# Altium PCB board.PcbDoc
Units mm, origin at the board's own origin, x right, y up, seen from the top; angles counter-clockwise.
Board outline 30.1 x 16.2 mm, 2 copper layers (Top Layer, Bottom Layer); 31 components, 29 nets, 112 pads, 16 vias.
Unrouted connection lines stored in the file: 1.
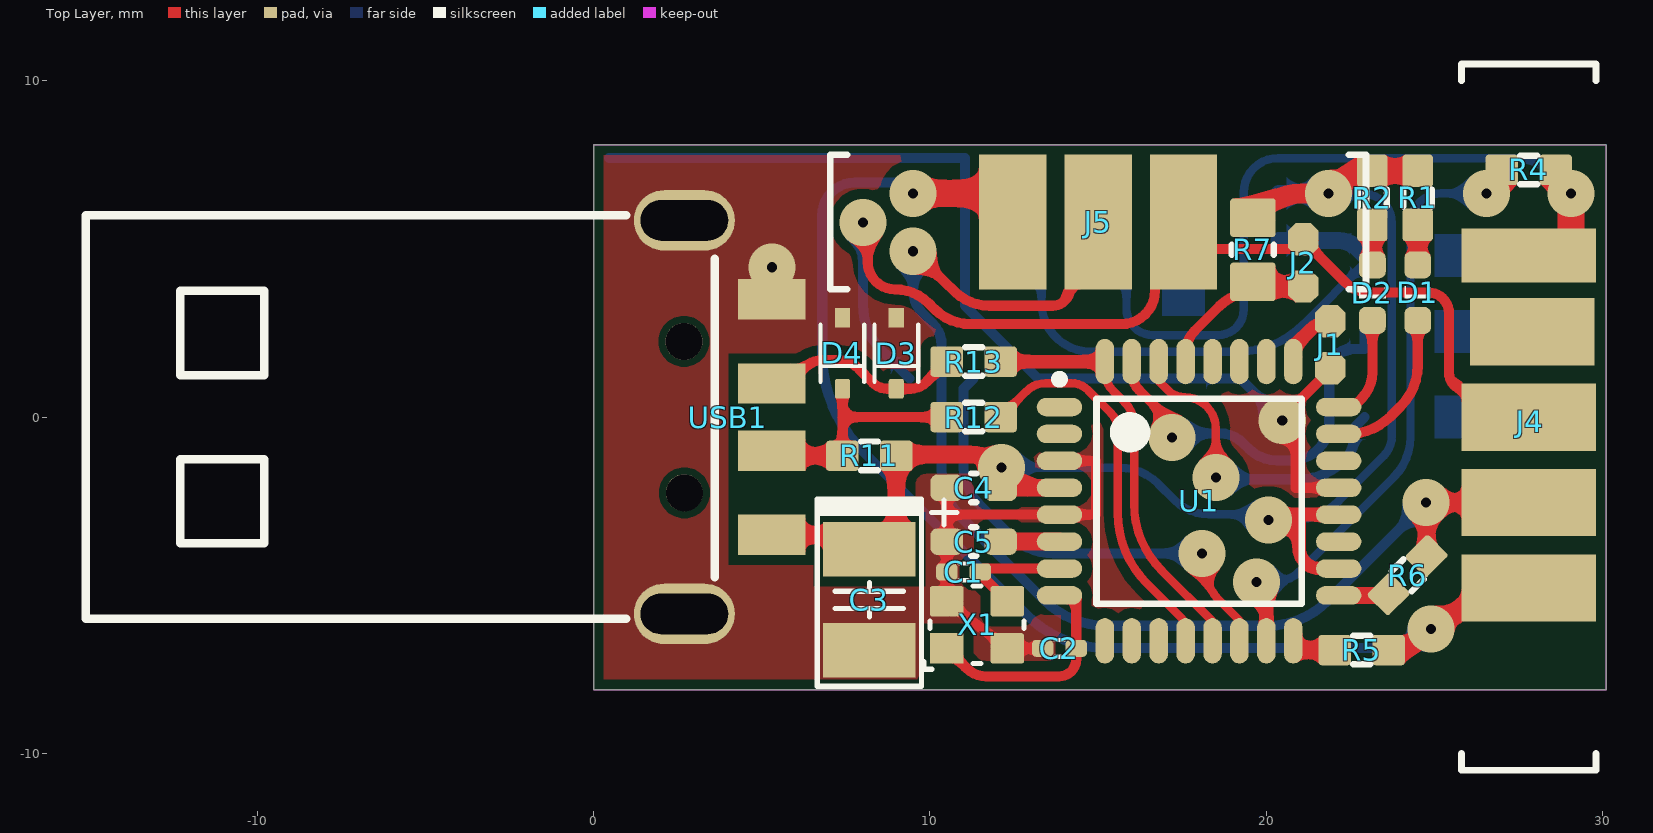
[diagram p0: Top Layer view]
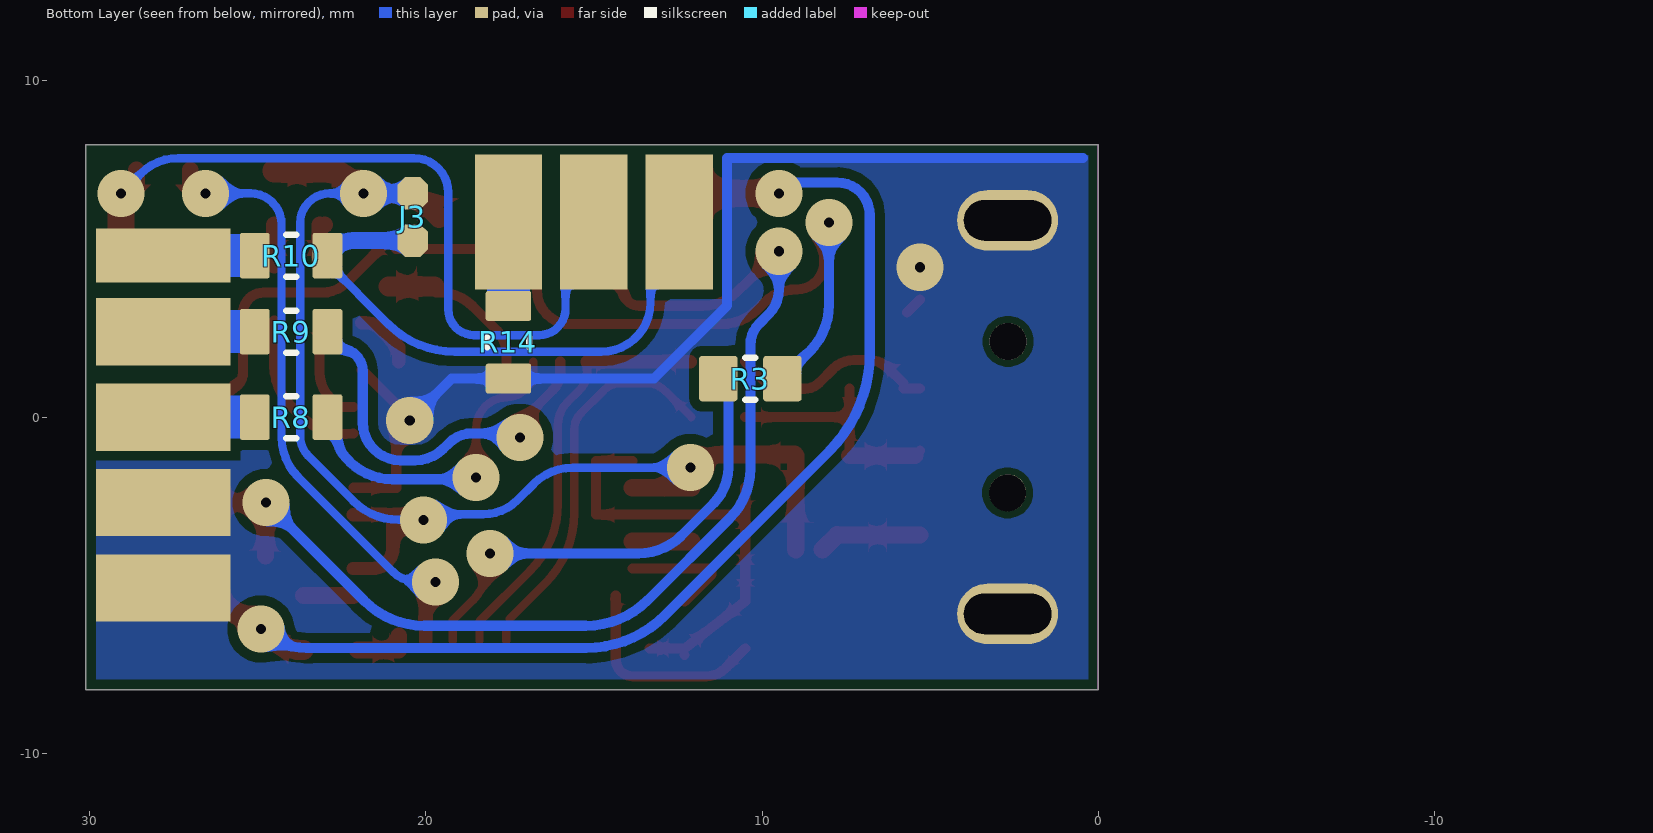
[diagram p1: Bottom Layer view, seen from below]
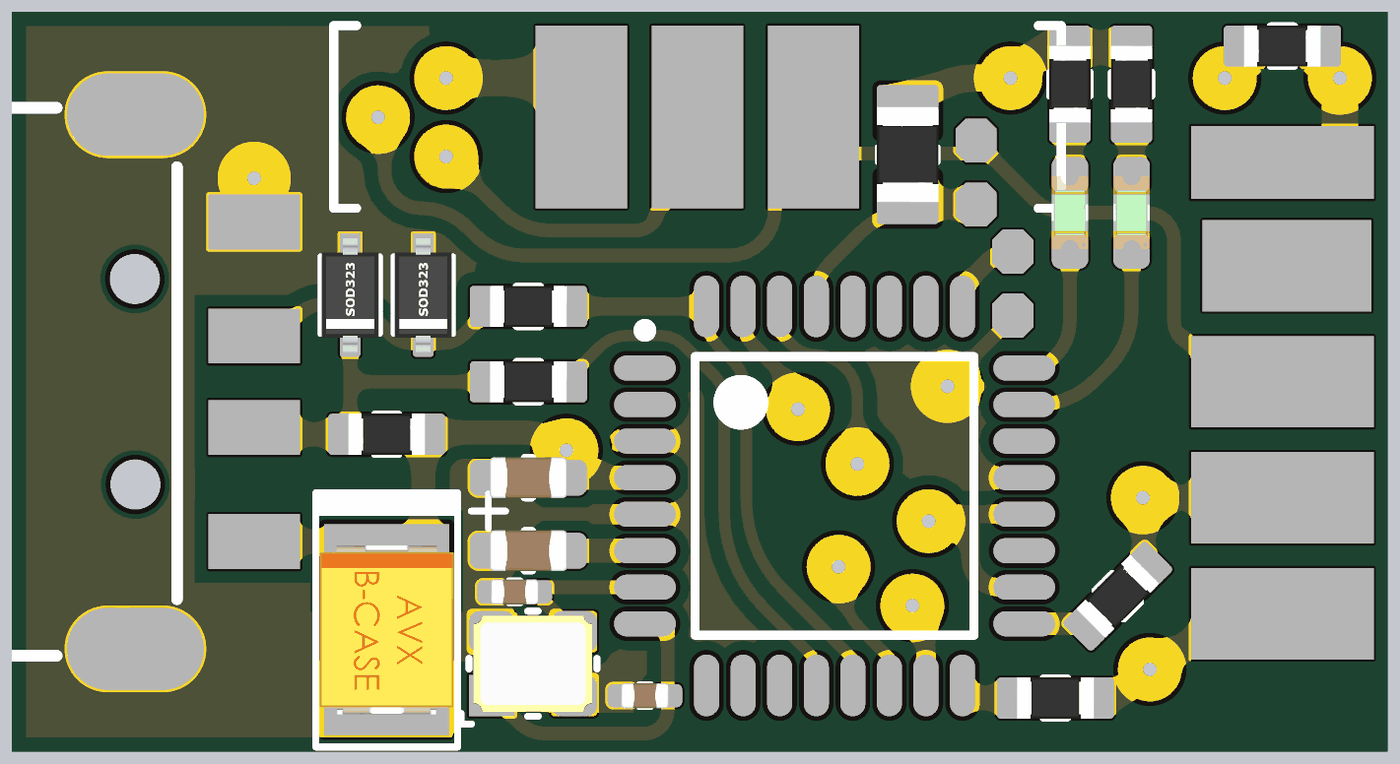
[diagram p2: 3D render of the assembled board from above, using the file's embedded part models]
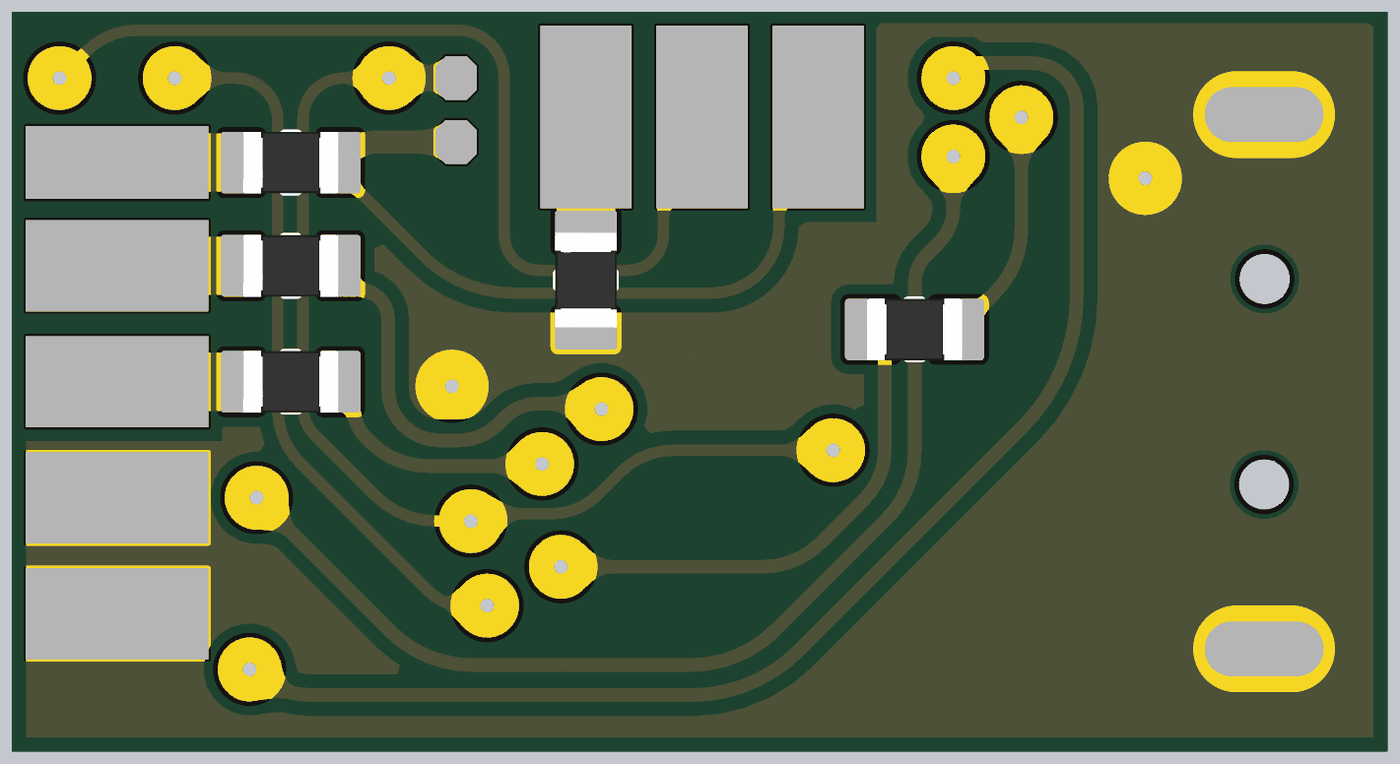
[diagram p3: 3D render of the assembled board from below, using the file's embedded part models]

## Layer stack, top to bottom
Top Solder: solder mask 0.0102, Solder Resist, Dk 3.5
Top Layer: signal copper 0.0356
Dielectric 1: dielectric 0.32, FR-4, Dk 4.8
Bottom Layer: signal copper 0.0356
Bottom Solder: solder mask 0.0102, Solder Resist, Dk 3.5

## Board outline
0,-8.1 0,8.1 30.1,8.1 30.1,-8.1

## Design rules (kind name [scope] priority, off if disabled: settings)
Clearance [All] p1: gap=0.2 ignorepadtopadclearanceinfootprint=FALSE except(0.3: Arc-Fill Arc-Poly Arc-Region Track-Fill Track-Poly Track-Region SMDPad-Fill SMDPad-Poly SMDPad-Region THPad-Fill THPad-Poly THPad-Region Via-Fill Via-Poly Via-Region Fill-Fill Fill-Poly Fill-Region Poly-Poly Poly-Region Region-Region)
ComponentClearance [All] p1: gap=0.01 collisioncheckmode=3 verticalgap=0.01 showdistances=FALSE donotcheckwithout3dbody=TRUE
HoleSize [All] p1: absolutevalues=TRUE maxlimit=3 minlimit=0.025 maxpercent=80.000 minpercent=20.000
MinimumSolderMaskSliver [All] p1 off: minsoldermaskwidth=0.254
PolygonConnect [All] p1: connectstyle=Direct reliefconductorwidth=0.254 reliefentries=4 polygonreliefangle="90 Angle" airgapwidth=0.254
RoutingVias [All] p1 off: holewidth=0.711 width=1.27 viastyle="Through Hole" minholewidth=0.711 minwidth=1.27 maxholewidth=0.711 maxwidth=1.27
SilkToSilkClearance [All] p1 off: silktosilkclearance=0.254
SilkToSolderMaskClearance [IsPad] p1 off: minsilkscreentomaskgap=0.254 clearancetoexposedcopper=TRUE
SolderMaskExpansion [All] p1: expansion=0.102 istentingtop=FALSE
SupplyNets "Schematic Supply Nets_1" [InNet('5V')] p1: voltage=0.000
SupplyNets "Schematic Supply Nets_3" [InNet('GND')] p2: voltage=0.000
Width [All] p1: maxlimit=12.7 minlimit=0.051 preferedwidth=0.254
25 further rules are at their usual default settings.

## Components (designator, comment, footprint, x,y, rotation, side; value= is the part's Value field where it differs from the comment)
C1 "18pF" C0402 11,-4.6 r0 top
C2 "18pF" C0402 13.85,-6.873 r0 top
C3 "100uF 16V" C3528 8.2,-5.432 r270 top
C4 "100n" C0603 11.3,-2.1 r0 top
C5 "100n" C0603 11.3,-3.7 r0 top
D1 "GRN" LED-0603-GRN 24.5,3.7 r90 top
D2 "RED" LED-0603-GRN 23.15,3.7 r90 top
D3 "3V3" SOD-323 9,1.897 r90 top
D4 "3V3" SOD-323 7.4,1.897 r90 top
J1 "Jumper" JMP_0603 21.9,2.15 r90 top
J2 "Jumper" JMP_0603 21.1,4.583 r90 top
J3 "Jumper" JMP_0603 20.38,5.95 r270 bottom
J4 "Header 5X2" HDR_2X5 27.8,0 r0 top
J5 "Header 3X2" HDR_2X3 15,5.8 r90 top
R1 "1k" R0603 24.5,6.517 r270 top
R2 "1k" R0603 23.15,6.517 r270 top
R3 "220" R0805 10.348,1.145 r180 bottom
R4 "220" R0603 27.8,7.35 r0 top
R5 "220" R0603 22.834,-6.927 r0 top
R6 "220" R0603 24.2,-4.698 r45 top
R7 "10k" R0805 19.6,4.976 r270 top
R8 "220" R0805_ 24,0 r0 bottom
R9 "220" R0805_ 24,2.54 r0 bottom
R10 "0" R0805_ 24,4.8 r0 bottom
R11 "2k2" R0603 8.2,-1.151 r0 top
R12 "68" R0603 11.3,0 r0 top
R13 "68" R0603 11.3,1.65 r0 top
R14 "0" R0805_ 17.54,2.225 r90 bottom
U1 "ATmega8-16AI" 32A_L 18,-2.5 r0 top
USB1 "48037-2100" USB-A-TH_480372100 4,0 r270 top
X1 "12MHZ" CRYSTAL_2.5x2.0mm 11.4,-6.173 r0 top

## Footprints (in the part's own frame and the unit in brackets; to place one, negate y for a bottom-side part, rotate by r counter-clockwise, add the part's x,y. Pads: shape width x height; smd on the part's side, far side on the other; paste and mask are expansions set on the pad)
32A_L [mm] "Thin QFP, 32-Leads, Body 7x7mm, Pitch 0.8mm, IPC High Density"
  oval 1.35x0.55 smd: 1(-4.15,2.8) 2(-4.15,2) 3(-4.15,1.2) 4(-4.15,0.4) 5(-4.15,-0.4) 6(-4.15,-1.2) 7(-4.15,-2) 8(-4.15,-2.8) 17(4.15,-2.8) 18(4.15,-2) 19(4.15,-1.2) 20(4.15,-0.4) 21(4.15,0.4) 22(4.15,1.2) 23(4.15,2) 24(4.15,2.8)
  oval 0.55x1.35 smd: 9(-2.8,-4.15) 10(-2,-4.15) 11(-1.2,-4.15) 12(-0.4,-4.15) 13(0.4,-4.15) 14(1.2,-4.15) 15(2,-4.15) 16(2.8,-4.15) 25(2.8,4.15) 26(2,4.15) 27(1.2,4.15) 28(0.4,4.15) 29(-0.4,4.15) 30(-1.2,4.15) 31(-2,4.15) 32(-2.8,4.15)
  silkscreen extent -4.27,-3.05 3.05,3.75, body extent -3.5,-3.5 3.5,3.5, height 1.2
C0402 [mm] "Chip Capacitor Body"
  rrect50% 0.635x0.508 smd mask+0.05: 1(-0.5,0) 2(0.5,0)
  silkscreen extent -0.13,-0.25 0.13,0.25, body extent -0.52,-0.27 0.53,0.28, height 0.55
C0603 [mil] "Chip Capacitor"
  rrect50% 38x31 smd mask+1.97: 1(-31.5,0) 2(31.5,0)
  silkscreen extent -3,-17 3,17, body extent -33,-18 33,18, height 35
C3528 [mil] "C3528_1"
  rect 64x108 smd: 1(-59.06,0) 2(59.06,0)
  silkscreen extent -118,-61 101,102, body extent -73,-58 73,58, height 80
CRYSTAL_2.5x2.0mm [mm]
  rect 1x0.9 smd paste+0 mask+0.051: 1(-0.9,-0.7)
  rrect15% 1x0.9 smd paste-2539.97 mask+0.051: 2(0.9,-0.7) 3(0.9,0.7) 4(-0.9,0.7)
  silkscreen extent -1.57,-1.32 1.4,1.15, body extent -1.3,-1.05 1.3,1.05, height 0.55
HDR_2X3 [mm] "Connector; Header; 5x2 Position"
  rect 4x2 smd mask+0.05: 1(0,2.54) 3(0,0) 5(0,-2.54)
  rect 4x2 smd far side mask+0.05: 2(0,2.54) 4(0,0) 6(0,-2.54)
  silkscreen extent -2,-7.96 2,7.96
HDR_2X5 [mm] "Connector; Header; 5x2 Position"
  rect 4x1.6 smd mask+0.05: 1(0,4.8)
  rect 4x1.6 smd far side mask+0.05: 2(0,4.8)
  rect 3.7x2 smd mask+0.05: 3(0.1,2.54)
  rect 4x2 smd far side mask+0.05: 4(0,2.54) 6(0,0) 8(0,-2.54) 10(0,-5.08)
  rect 4x2 smd mask+0.05: 5(0,0) 7(0,-2.54) 9(0,-5.08)
  silkscreen extent -2,-10.5 2,10.5
JMP_0603 [mm] "Chip Resistor; Body 1.6 x 0.8 mm (LxW typ)"
  oct 0.965x0.9 smd mask+0.05: 1(-0.7,0) 2(0.7,0)
LED-0603-GRN [mm]
  rrect50% 0.8x0.8 smd mask+0.05: 1(0.825,0) 2(-0.825,0)
  silkscreen extent -0.18,-0.4 0.2,0.4, body extent -0.8,-0.4 0.8,0.4, height 0.6
R0603 [mil] "Chip Resistor; Body 1.6 x 0.8 mm (LxW typ)"
  rrect20% 38x35.43 smd mask+1.97: 1(-31.5,0) 2(31.5,0)
  silkscreen extent -10,-17 10,17, body extent -33,-18 33,18, height 22
R0805 [mil] "Chip Resistor; Body 1.6 x 0.8 mm (LxW typ)"
  rrect15% 45x53.15 smd: 1(-37.5,0) 2(37.5,0)
  silkscreen extent -6,-25 6,25, body extent -41,-27 41,27, height 24
R0805_ [mm] "Chip Resistor; Body 1.6 x 0.8 mm (LxW typ)"
  rrect15% 0.889x1.35 smd: 1(-1.079,0) 2(1.08,0)
  silkscreen extent -0.15,-0.63 0.15,0.63, body extent -1.05,-0.68 1.05,0.67, height 0.6
SOD-323 [mm]
  rect 0.59x0.45 smd mask+0.05: 1(1.055,0)
  rrect30% 0.59x0.45 smd mask+0.05: 2(-1.055,0)
  silkscreen extent -0.85,-0.65 0.85,0.65, body extent -1.25,-0.63 1.25,0.62, height 0.99
USB-A-TH_480372100 [mm]
  rect 1.2x2 smd paste-100 mask+0.051: 1(3.5,1.3) 2(1,1.3) 3(-1,1.3) 4(-3.5,1.3)
  oval 1.8x3 hole 1.2 slot 2.6 at 90 deg paste-2539.97 mask+0.051: 5(-5.85,-1.3) 6(5.85,-1.3)
  round 1.1 hole 1.1 unplated paste-2539.97: ""(-2.25,-1.313) ""(2.25,-1.3)
  silkscreen extent -6,-19.09 6,-0.39, body extent -6,-19.09 6,-0.4, height 3.1

## Part data
C1 C2: library part CAP, "18pF 50V 0402"
C3: library part 220uF
C4 C5: library part Cap
D1: library part LED-0603-GREEN, "LED 0603 GRN"
D2: library part LED-0603-RED
D3 D4: library part NCP51460SN33T1G, "SD03"
J4: "Header, 5-Pin, Dual row"
J5: "Header, 6-Pin, Dual row"
R1 R2 R3 R4 R5 R6 R7 R8 R9 R10 R11 R12 R13 R14: library part RES
U1: "8-Bit AVR Microcontroller with 8K Bytes of In-System Programmable Flash Memory"
X1: library part "CRYSTAL 12MHZ 3.20mm x 2.50mm", "CRYSTAL 12MHZ 10PF SMD"

## Via types
v1: diameter 1.4, hole 0.3, Top Layer to Bottom Layer, 16 vias

## Nets (pads, with @x,y where several pads share a name; then routed paths per layer and width w, separated by ;. In a path a pad name is that pad's centre, name@x,y a point inside that pad or via, vN(x,y) a via of type N, cw(c..) or ccw(c..) an arc to the next point about the centre after c; other vN are vias at no path point)
5V: C3.1 C4.2 C5.2 J3.1 R1.1 R2.1 R7.1 R11.2 U1.4 U1.6 U1.18 U1.20 USB1.1 | length 47
  Top Layer w0.4: v1@20.06,-3.285 20.975,-3.285 ; v1(20.06,-3.052) 20.06,-2.9 20.975,-2.9 ; U1.18 21.588,-4.5 cw(c21.588,-3.887) 20.975,-3.887 20.975,-3.285 ; U1.20 20.975,-2.9 ; 20.975,-3.285 20.975,-2.9
  Top Layer w0.5: USB1.1 C3.1@7.769,-3.5
  Top Layer w0.53: C3.1@7.769,-3.5 C3.1 ; C3.1@9,-3.933 R11.2 9.039,-1.112 11.194,-1.112 cw(c11.194,-2.438) v1(12.132,-1.5) ; C5.2 U1.6 ; C4.2 U1.4
  Top Layer w0.6: R7.1 19.801,6.129 cw(c21.058,4.872) 21.058,6.65 v1(21.85,6.65)
  Top Layer w0.7: v1(21.85,6.65) 22.153,6.953 cw(c23.033,6.073) 23.033,7.317 R2.1 R1.1
  Bottom Layer w0.25: v1(12.132,-1.5) 15.626,-1.5 cw(c15.626,-3.137) 16.784,-1.98 17.274,-2.47 ccw(c18.29,-1.454) 18.29,-2.89 19.898,-2.89 v1(20.06,-3.052) 20.803,-3.052 ccw(c20.803,-1.15) 22.149,-2.495 23.483,-1.161 ccw(c22.879,-0.558) 23.733,-0.558 23.733,5.769 ccw(c22.852,5.769) 22.852,6.65 v1(21.85,6.65)
  Bottom Layer w0.5: J3.1 v1(21.85,6.65)
DM: R12.2 U1.12 | length 11.3
  Top Layer w0.25: R12.2 12.873,0.773 cw(c13.444,0.202) 13.444,1.01 14.194,1.01 cw(c14.194,0.291) 14.702,0.799 15.379,0.122 cw(c14.886,-0.372) 15.584,-0.372 15.584,-2.851 ccw(c18.547,-2.851) 16.452,-4.946 U1.12@17.506,-6.001 ; U1.12 U1.12@17.6,-6.227
DP: R13.2 U1.13 U1.32 | length 12.5
  Top Layer w0.25: U1.32 15.2,1.359 ccw(c15.992,1.359) 15.432,0.8 15.78,0.452 cw(c15.083,-0.245) 16.069,-0.245 16.069,-2.578 ccw(c18.868,-2.578) 16.888,-4.557 18.4,-6.069 U1.13
  Top Layer w0.4: R13.2@12.132,1.65 U1.32
GND: C1.1 C2.1 C3.2 C4.1 C5.1 D3.1 D4.1 J1.1 J4.8 J4.10 R14.1 U1.3 U1.5 U1.21 USB1.4 USB1.5 USB1.6 X1.2 X1.4 | length 46.5
  Top Layer w0.3: USB1.5 USB1.5@3.905,5.85 ; USB1.4 USB1.4@5.695,3.105 ; 10.5,-2.9 U1.5 14.932,-2.9 14.932,-1.3 U1.3 ; C4.1 C5.1 C1.1 X1.4 X1.2 C2.1 ; J1.1@21.9,1.406 20.873,0.379 20.873,-2.1 U1.21
  Bottom Layer w0.3: 0.46,7.7 11.038,7.7 11.038,3.32 13.212,1.145 R14.1 19.226,1.145 v1@20.372,0
  other v1: 20.472,-0.1 5.3,4.455
MISO: J4.9 J5.1 R5.2 | length 38.6
  Top Layer w0.5: J4.9@26.627,-5.4 cw(c27.399,-6.172) 27.399,-5.08 J4.9
  Top Layer w0.6: R5.2 ccw(c23.634,-5.383) 24.725,-6.475 v1(24.9,-6.3) 24.965,-6.235 cw(c26.222,-7.493) 26.222,-5.715 J4.9@26.926,-5.715
  Top Layer w0.8: v1(9.5,6.65) 12.446,6.65 J5.1@12.446,5.944
  Bottom Layer w0.3: v1(9.5,6.65) 9.174,6.976 7.768,6.976 ccw(c7.768,6.008) 6.8,6.008 6.8,1.889 ccw(c10.891,1.889) 7.998,-1.004 12.884,-5.889 ccw(c15.234,-3.539) 15.234,-6.863 23.541,-6.863 ccw(c23.541,-4.941) v1(24.9,-6.3)
MOSI: J4.1 J5.4 R4.2 | length 25.6
  Top Layer w0.5: R4.2 28.6,6.929 ccw(c28.879,6.929) 28.879,6.65 v1(29.06,6.65)
  Top Layer w0.6: J4.1 J4.1@29.06,4.8
  Top Layer w0.8: J4.1@29.06,4.8 v1(29.06,6.65)
  Bottom Layer w0.25: J5.4 15.844,4.956 15.844,3.22 ccw(c16.626,3.22) 16.626,2.438 18.564,2.438 ccw(c18.564,3.203) 19.329,3.203 19.329,6.681 cw(c20.348,6.681) 20.348,7.7 27.355,7.7 cw(c27.355,6.119) 28.473,7.237 v1(29.06,6.65)
NetC1_2: C1.2 U1.7 X1.3 | length 3.6
  Top Layer w0.3: X1.3 11.5,-4.673 C1.2 11.6,-4.5 U1.7
NetC2_2: C2.2 U1.8 X1.1 | length 6.3
  Top Layer w0.3: X1.1 11.091,-7.464 ccw(c11.672,-6.882) 11.672,-7.705 13.842,-7.705 ccw(c13.842,-7.196) 14.35,-7.196 C2.2 U1.8@14.35,-5.3
NetD1_1: D1.1 R1.2 | length 1.2
  Top Layer w0.5: D1.1 R1.2
NetD1_2: D1.2 U1.23 | length 4.8
  Top Layer w0.3: U1.23@22.152,-0.489 ccw(c22.407,1.324) 23.702,0.029 23.998,0.325 ccw(c22.785,1.538) 24.5,1.538 D1.2
NetD2_1: D2.1 R2.2 | length 1.2
  Top Layer w0.5: D2.1 R2.2
NetD2_2: D2.2 U1.24 | length 3.2
  Top Layer w0.3: U1.24 22.576,0.3 22.832,0.557 ccw(c22.065,1.324) 23.15,1.324 D2.2
NetD3_2: D3.2 R13.1 USB1.3 | length 6
  Top Layer w0.3: USB1.3@5.3,0.847 USB1.3@5.792,0.847 ; USB1.3@5.792,1 6.261,1.469 cw(c6.802,0.927) 6.802,1.693 7.272,1.693 cw(c7.272,0.829) 7.883,1.44 8.293,1.03 ccw(c8.746,1.484) 8.746,0.842 9.05,0.842 9.414,0.842 ccw(c9.414,1.514) 9.889,1.039 R13.1
NetD4_2: D4.2 R11.1 R12.1 USB1.2 | length 7.1
  Top Layer w0.3: USB1.2 USB1.2@5.451,-1.151 ; R11.1@7.4,-1 7.4,0 ; D4.2 7.4,0 ; R12.1 7.4,0
  Top Layer w0.5: USB1.2@5.451,-1.151 R11.1
NetJ1_2: J1.2 U1.25 | length 1.8
  Top Layer w0.4: U1.25 20.8,2.078 21.342,2.619 cw(c21.792,2.169) 21.792,2.806 J1.2@21.9,2.806
NetJ2_1: J2.1 R7.2 U1.29 | length 4.6
  Top Layer w0.3: U1.29 17.6,1.902 cw(c18.548,1.902) 17.878,2.573 18.594,3.289 ; 18.594,3.289 cw(c19.601,2.282) R7.2@19.698,3.703
  Top Layer w0.6: R7.2@19.741,3.883 J2.1
NetJ3_2: J3.2 J5.2 R10.1 | length 16.9
  Bottom Layer w0.25: J5.2 13.317,4.943 13.317,3.404 ccw(c14.777,3.404) 14.777,1.943 19.133,1.943 ccw(c19.133,4.729) 21.103,2.759 R10.1@22.921,4.577
  Bottom Layer w0.5: J3.2 22.157,5.25 cw(c22.157,4.492) 22.693,5.028 R10.1
NetJ4_2: J4.2 R10.2
NetJ5_6: J5.6 R14.2
NetR3_1: R3.1 U1.14 | length 14.1
  Top Layer w0.25: v1(18.089,-4.052) 18.089,-4.204 ccw(c19.852,-4.204) 18.605,-5.45 19.2,-6.045 U1.14
  Bottom Layer w0.3: R3.1 11,0.845 11,-1.493 ccw(c12.523,-1.493) 11.446,-2.57 12.397,-3.52 ccw(c13.682,-2.235) 13.682,-4.052 v1(18.089,-4.052)
NetR4_1: R4.1 U1.15 | length 18.7
  Top Layer w0.4: v1(19.703,-4.903) 20,-5.2 U1.15
  Top Layer w0.5: v1(26.54,6.65) 26.721,6.65 ccw(c26.721,6.929) 27,6.929 R4.1
  Bottom Layer w0.25: v1(19.703,-4.903) 20.223,-4.903 ccw(c20.223,-3.825) 20.985,-4.588 23.791,-1.782 ccw(c22.599,-0.59) 24.284,-0.59 24.284,5.731 cw(c25.204,5.731) 25.204,6.65 v1(26.54,6.65)
NetR5_1: R5.1 U1.16 | length 1.4
  Top Layer w0.5: U1.16@20.8,-6.927 R5.1 ; U1.16 U1.16@20.8,-6.51
NetR6_1: R6.1 U1.17 | length 1.5
  Top Layer w0.5: U1.17 R6.1@23.634,-5.3
NetR8_1: R8.1 U1.30 | length 10.2
  Top Layer w0.25: U1.30 16.8,1.073 17.075,0.798 ccw(c17.571,1.293) 17.571,0.592 cw(c17.571,-0.337) 18.5,-0.337 v1(18.5,-1.8) ; v1@18.4,-2.1 v1@18.6,-1.9
  Bottom Layer w0.3: v1(18.5,-1.8) 18.547,-1.847 20.99,-1.847 ccw(c20.99,-0.054) 22.258,-1.322 22.355,-1.225 ccw(c21.684,-0.554) 22.633,-0.554 22.633,-0.288 R8.1
NetR9_1: R9.1 U1.31 | length 11.8
  Top Layer w0.3: U1.31 16,1.343 ccw(c16.78,1.343) 16.228,0.792 17.2,-0.18 v1(17.2,-0.6)
  Bottom Layer w0.3: v1(17.2,-0.6) 17.314,-0.483 18.615,-0.483 cw(c18.615,-1.454) 19.301,-0.767 19.468,-0.934 ccw(c20.313,-0.089) 20.313,-1.284 20.746,-1.284 ccw(c20.746,-0.16) 21.87,-0.16 21.87,1.372 cw(c22.521,1.372) 22.521,2.023 22.921,2.023 R9.1
RESET: J2.2 J4.5 J5.5 R3.2 | length 33.5
  Top Layer w0.3: v1(8.011,5.79) 8.152,5.649 8.152,4.607 ccw(c8.961,4.607) 8.961,3.799 cw(c8.961,2.384) 9.961,3.384 10.132,3.213 ccw(c11.218,4.298) 11.218,2.763 15.69,2.763 ccw(c15.69,3.767) 16.694,3.767 16.694,4.954 J5.5 18.34,5 J2.2@20.874,5 ; J2.2@21.1,5.26 22.364,3.995 ccw(c23.078,4.708) 23.078,3.7 24.822,3.7 cw(c24.822,3.092) 25.43,3.092 25.43,1.315 ccw(c25.935,1.315) 25.935,0.81 26.99,0.81 J4.5 J4.5@26.612,0
  Bottom Layer w0.3: v1(8.011,5.79) 8.011,3.343 ccw(c9.976,3.343) 8.587,1.954 R3.2
RXD: J4.6 R8.2
SCK: J4.7 J5.3 R6.2 | length 37.2
  Top Layer w0.3: v1@9.5,4.921 10.742,3.727 ccw(c11.775,4.802) 11.775,3.311 13.649,3.311 ccw(c13.649,3.822) 14.16,3.822 14.16,4.96 J5.3
  Top Layer w0.5: v1(24.748,-2.54) v1@24.766,-2.54 ; R6.2 v1@24.766,-2.54 ; J4.7 v1@24.766,-2.54
  Bottom Layer w0.3: v1(9.5,4.931) 9.5,3.792 ccw(c10.531,3.792) 9.802,3.063 10.085,2.779 cw(c9.452,2.146) 10.348,2.146 10.348,-1.526 ccw(c12.436,-1.526) 10.959,-3.003 13.39,-5.434 ccw(c15.246,-3.579) 15.246,-6.203 20.033,-6.203 ccw(c20.033,-3.669) 21.825,-5.461 v1@24.697,-2.589
TXD: J4.4 R9.2
pads on no net: J4.3 U1.1 U1.2 U1.9 U1.10 U1.11 U1.19 U1.22 U1.26 U1.27 U1.28 USB1.

## Polygon pours and split planes (outlines as drawn)
GND on Top Layer "GND_L01_P000" (solid, remove dead copper, pour order 0): -2.5,10 -2.5,-10 32.5,-10 32.5,10
GND on Bottom Layer "GND_L02_P001" (solid, remove dead copper, pour order 1): -2.5,10 -2.5,-10 32.5,-10 32.5,10

## Keep-outs
Keep-Out Layer:
  the board outline again, w0.01

## Other copper
Top Layer:
  pour cut-out: 4.004,-0.822 4.004,-4.4 5.3,-4.4 5.3,-0.1 4,-0.1
  pour cut-out: 22.447,-1.655 22.447,-2.673 22.9,-2.673 22.9,-1.655
Bottom Layer:
  region net RXD: 25.002,0.637 25.002,-0.637 28.475,-0.637 28.475,0.637
  region net TXD: 25.002,3.177 25.002,1.903 28.475,1.903 28.475,3.177
  region net NetJ4_2: 25.002,5.437 25.002,4.163 28.475,4.163 28.475,5.437
  rectangle net NetJ5_6: 16.903,3.002 18.177,6.475